# EAGLE board LedController (EAGLE 6.4)
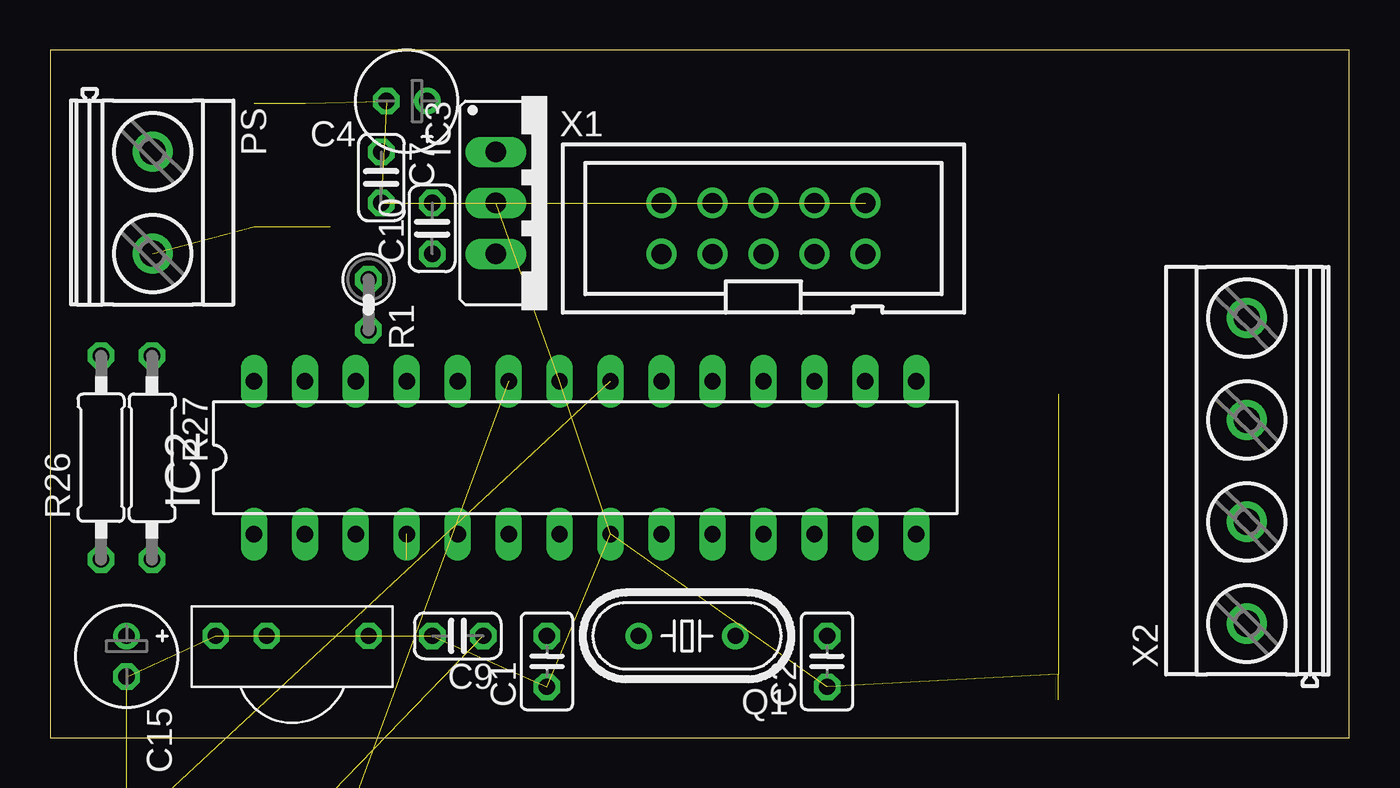
[diagram p0: board, top side]
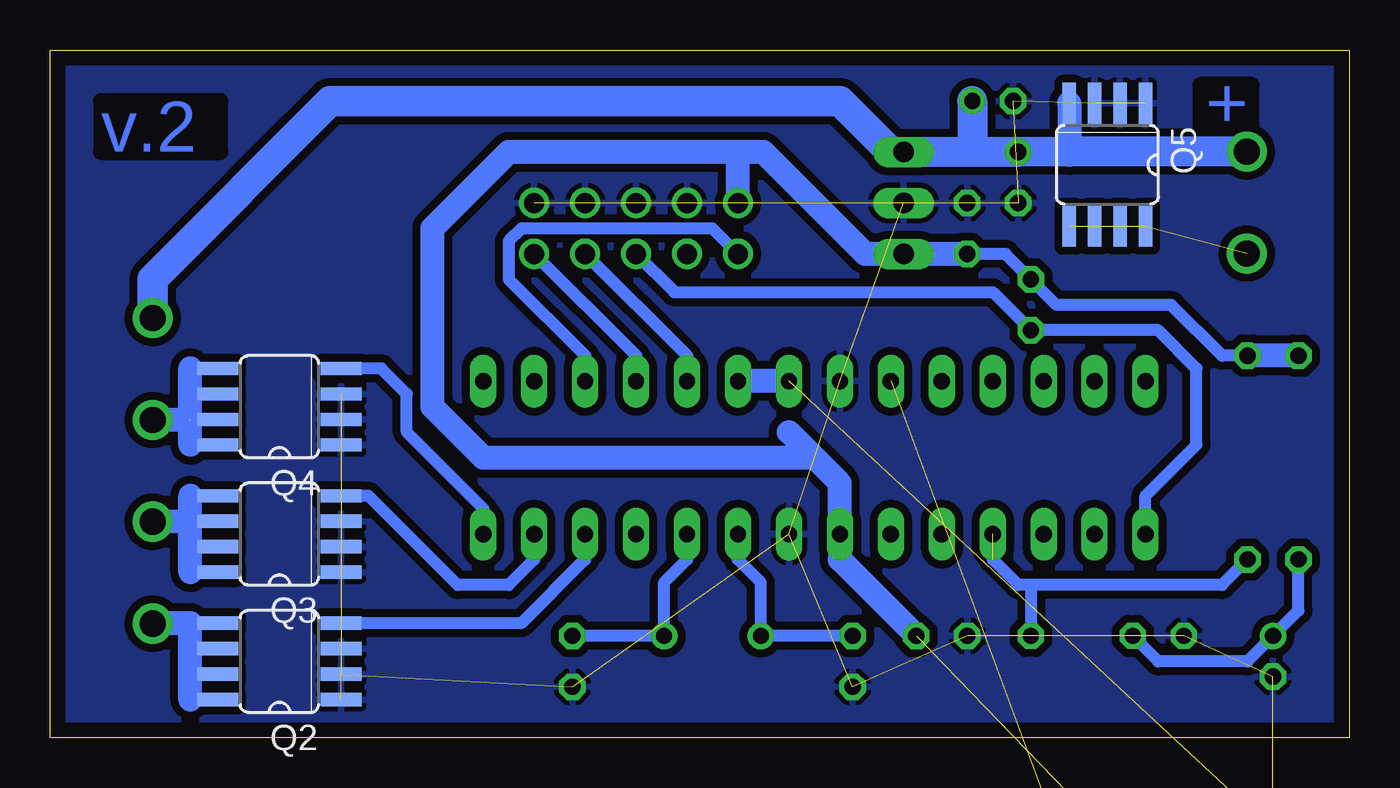
[diagram p1: board, bottom side, seen from below]

Size 64.77 x 34.29 mm. Coordinates in mm from the lower left corner, seen from the top.
Outline: 0,0 64.77,0 64.77,34.29 0,34.29 0,0
Copper layers (1*16): Top 0.035mm / dielectric 1.5mm / Bottom 0.035mm
Design rules "default *": minimum track width 10mil, minimum drill 24mil, track to track 8mil, track to pad 8mil, pad to pad 8mil, via to via 8mil, smd to smd 8mil, copper to edge 30mil, drill to drill 8mil, minimum pad ring 10mil, minimum via ring 8mil, stop-mask expansion 4mil, vias tented up to drill 0mil, thermal gap 10mil
Net classes: 0 default: width 0.4 mm; 1 +12V: width 0.406 mm

## Footprints (pad centres in the part's own frame; a part is rotated, then mirrored left to right if it is on the bottom)
C025-025X050 = drill 0.813 octagon: 1 -1.27,0; 2 1.27,0
E2-5 = drill 0.813 pad 1.27: + -1.016,0 | drill 0.813 pad 1.27 octagon: - 1.016,0
C025-024X044 = drill 0.813 octagon: 1 -1.27,0; 2 1.27,0
SOT23-5 = smd 0.6 x 1.2: 1 -0.95,-1.306; 2 0,-1.306; 3 0.95,-1.306; 4 0.95,1.306; 5 -0.95,1.306
DIL28-3 = drill 0.813 long: 1 -16.51,-3.81; 2 -13.97,-3.81; 3 -11.43,-3.81; 4 -8.89,-3.81; 5 -6.35,-3.81; 6 -3.81,-3.81; 7 -1.27,-3.81; 8 1.27,-3.81; 9 3.81,-3.81; 10 6.35,-3.81; 11 8.89,-3.81; 12 11.43,-3.81; 13 13.97,-3.81; 14 16.51,-3.81; 15 16.51,3.81; 16 13.97,3.81; 17 11.43,3.81; 18 8.89,3.81; 19 6.35,3.81; 20 3.81,3.81; 21 1.27,3.81; 22 -1.27,3.81; 23 -3.81,3.81; 24 -6.35,3.81; 25 -8.89,3.81; 26 -11.43,3.81; 27 -13.97,3.81; 28 -16.51,3.81
78XXS = drill 1.016 long: GND 0,-2.54; IN -2.54,-2.54; OUT 2.54,-2.54
MKDSN1,5/2-5,08 = drill 1.3 pad 2: 1 -2.561,0.025; 2 2.519,0.025
HC49/S = drill 0.813: 1 -2.413,0; 2 2.413,0
SO08 = smd 0.66 x 2.032: 1 -1.905,-3.073; 2 -0.635,-3.073; 3 0.635,-3.073; 4 1.905,-3.073; 5 1.905,3.073; 6 0.635,3.073; 7 -0.635,3.073; 8 -1.905,3.073
0207/2V = drill 0.813 octagon: 1 -1.27,0; 2 1.27,0
0207/10 = drill 0.813 octagon: 1 -5.08,0; 2 5.08,0
TSOP = drill 0.8 octagon: GND -3.81,2.54; VO 3.81,2.54; VS -1.27,2.54
PAK100/2500-10 = drill 1 pad 1.422: 1 -5.08,-1.27; 2 -5.08,1.27; 3 -2.54,-1.27; 4 -2.54,1.27; 5 0,-1.27; 6 0,1.27; 7 2.54,-1.27; 8 2.54,1.27; 9 5.08,-1.27; 10 5.08,1.27
MKDSN1,5/4-5,08 = drill 1.3 pad 2: 1 -7.641,0.025; 2 -2.561,0.025; 3 2.519,0.025; 4 7.599,0.025

## Placement (x,y rotation side)
C1  22pF  [C025-025X050]  24.77,3.81 90 top
C2  22pF  [C025-025X050]  38.73,3.81 90 top
C3  100nF  [C025-025X050]  2.54,-6.99 0 top  (outside the outline)
C4  100uF  [E2-5]  17.78,31.75 180 top
C5  1uF  [C025-024X044]  1.91,-25.4 0 top  (outside the outline)
C6  4n7  [C025-024X044]  -5.08,-60.96 0 top  (outside the outline)
C7  100nF  [C025-024X044]  16.51,27.94 270 top
C9  100nF  [C025-024X044]  20.32,5.08 180 top
C10  100nF  [C025-024X044]  19.05,25.4 90 top
C15  4.7uF  [E2-5]  3.81,4.06 270 top
IC1  MCP601R  [SOT23-5]  -4.45,-31.75 0 top  (outside the outline)
IC2  MEGA8-P  [DIL28-3]  26.67,13.97 0 top
IC3  7805  [78XXS]  24.77,26.67 270 top
PS  MKDSN1,5/2-5,08  [MKDSN1,5/2-5,08]  5.08,26.67 270 top
Q1  16MHz  [HC49/S]  31.75,5.08 180 top
Q2  FDS8884  [SO08]  53.34,3.81 90 bottom
Q3  FDS8884  [SO08]  53.34,10.16 90 bottom
Q4  FDS8884  [SO08]  53.34,16.51 90 bottom
Q5  FDS8884  [SO08]  12.06,28.57 180 bottom
R1  10k  [0207/2V]  15.88,21.59 270 top
R2  100  [0207/2V]  2.54,-13.34 0 top  (outside the outline)
R3  1k  [0207/2V]  2.54,-19.05 0 top  (outside the outline)
R4  1k  [0207/2V]  2.54,-31.75 0 top  (outside the outline)
R5  10k  [0207/2V]  -5.08,-37.47 0 top  (outside the outline)
R6  10k  [0207/2V]  -5.08,-43.18 0 top  (outside the outline)
R7  10k  [0207/2V]  -5.08,-48.9 0 top  (outside the outline)
R8  12k  [0207/2V]  -5.08,-54.61 0 top  (outside the outline)
R26  100R  [0207/10]  2.54,13.97 90 top
R27  10k  [0207/10]  5.08,13.97 270 top
TSOP  TSOP  [TSOP]  12.06,2.54 0 top
X1  2510-  [PAK100/2500-10]  35.56,25.4 0 top
X2  MKDSN1,5/4-5,08  [MKDSN1,5/4-5,08]  59.69,13.34 90 top

## Library data of the parts
C1-C7 C9 C10 C15 R1-R8 R26 R27 = rcl
IC1 = linear
IC2 = atmel
IC3 = v-reg
PS X2 = con-phoenix-508
Q1 = crystal
Q2-Q5 = FDS8884
TSOP = TSOP1736
X1 = con-3m

## Nets
+5V: C9.1 C10.1 IC1.2 IC2.7 IC3.OUT R1.1 R2.2 R3.2 R5.1 R26.2 R27.1 X1.2
+12V: C4.+ C7.1 IC3.IN PS.1 Q5.4 X2.4
ADC: C6.2 IC2.23 R8.2
GND: C1.1 C2.1 C3.2 C4.- C6.1 C7.2 C9.2 C10.2 C15.- IC1.5 IC2.8 IC2.22 IC3.GND Q2.1 Q2.2 Q2.3 Q3.1 Q3.2 Q3.3 Q4.1 Q4.2 Q4.3 Q5.1 Q5.2 Q5.3 R6.2 TSOP.GND X1.4 X1.6 X1.8 X1.10
IR: IC2.4 R27.2 TSOP.VO
ISP_CLK: IC2.19 X1.7
ISP_MISO: IC2.18 X1.9
ISP_MOSI: IC2.17 X1.1
ISP_RESET: IC2.1 R1.2 X1.5
N$1: C5.1 R3.1
N$2: C1.2 IC2.9 Q1.2
N$3: C2.2 IC2.10 Q1.1
N$4: Q2.5 Q2.6 Q2.7 Q2.8 X2.1
N$5: Q3.5 Q3.6 Q3.7 Q3.8 X2.2
N$6: Q4.5 Q4.6 Q4.7 Q4.8 X2.3
N$7: C3.1 IC2.20 IC2.21 R2.1
N$8: PS.2 Q5.5 Q5.6 Q5.7 Q5.8
N$9: C5.2 R4.2 R7.1
N$10: IC1.4 R4.1
N$11: IC1.3 R5.2 R6.1
N$12: IC1.1 R7.2 R8.1
N$63: C15.+ R26.1 TSOP.VS
PWM_B: IC2.14 Q4.4
PWM_G: IC2.13 Q3.4
PWM_R: IC2.12 Q2.4

## Tracks (layer width: path | path; a pad name or v marks a point on that pad's centre or on a via)
+5V  (4 unrouted)
  Bottom 0.6: R27.1 6.35,19.05 8.89,21.59 14.61,21.59 R1.1 17.14,24.13 C10.1
  Bottom 1.2: 26.67,13.97 25.4,12.7 IC2.7 25.4,8.89 C9.1 | 26.67,13.97 27.94,15.24 | 30.48,29.21 29.21,29.21 24.13,24.13 IC3.OUT C10.1 | 30.48,29.21 41.91,29.21 45.72,25.4 45.72,16.51 43.18,13.97 26.67,13.97 | X1.2 30.48,29.21 | R26.2 R27.1
+12V
  Bottom 1.2: Q5.4 13.97,29.22
  Bottom 1.5: PS.1 13.97,29.22 C7.1 18.41,29.21 | 18.41,29.21 IC3.IN | C4.+ 18.8,29.59 18.41,29.21
  Bottom 1.524: X2.4 59.66,22.89 50.8,31.75 25.4,31.75 22.86,29.21 IC3.IN
ADC  (2 unrouted)
GND  (30 unrouted)
  pour Bottom (isolate 0.4): 0,34.29 0,0 64.77,0 64.77,34.29
IR  (1 unrouted)
  Bottom 0.6: 17.78,8.89 16.51,7.62 15.88,7.62 | R27.2 6.35,7.62 15.88,7.62 | 15.88,7.62 TSOP.VO
ISP_CLK
  Bottom 0.6: IC2.19 33.02,19.05 X1.7
ISP_MISO
  Bottom 0.6: IC2.18 35.56,19.05 X1.9
ISP_MOSI
  Bottom 0.6: IC2.17 38.1,19.05 41.91,22.86 41.91,24.77 41.27,25.4 31.75,25.4 X1.1
ISP_RESET
  Bottom 0.6: IC2.1 10.16,12.06 7.62,14.61 7.62,18.41 9.53,20.32 R1.2 17.78,22.23 33.66,22.23 X1.5
N$1  (1 unrouted)
N$2
  Bottom 0.6: IC2.9 30.48,8.89 29.34,7.75 Q1.2 C1.2
N$3
  Bottom 0.6: IC2.10 33.02,8.89 34.16,7.75 Q1.1 C2.2
N$4
  Bottom 0.66: Q2.8 57.78,1.91 | Q2.7 56.42,3.18 57.78,3.18 | 57.78,5.71 Q2.5 | Q2.6 57.78,4.44
  Bottom 1.2: X2.1 57.78,5.71 57.78,4.44 57.78,3.18 57.78,1.91
N$5
  Bottom 0.66: Q3.8 57.78,8.26 | Q3.7 57.78,9.53 57.78,9.42 | Q3.6 57.78,10.79 57.78,10.52 | 57.78,12.06 Q3.5
  Bottom 1.2: 57.78,10.79 X2.2 | 57.78,10.79 57.78,12.06 | 57.78,8.26 57.78,9.42 57.78,10.79
N$6  (1 unrouted)
  Bottom 0.66: Q4.7 57.78,15.88 57.78,15.95 | Q4.6 57.78,17.14 57.78,16.98 | 57.78,18.41 Q4.5 | Q4.8 57.78,14.61
  Bottom 1.2: 57.78,14.61 57.78,15.85 | 57.78,15.85 57.78,16.98 57.78,18.41 | 57.78,15.85 X2.3
N$7  (2 unrouted)
  Bottom 1.2: IC2.21 IC2.20
N$8  (4 unrouted)
N$9  (2 unrouted)
N$10  (1 unrouted)
N$11  (2 unrouted)
N$12  (2 unrouted)
N$63
  Bottom 0.6: R26.1 2.54,6.35 C15.+ 5.08,3.81 9.53,3.81 TSOP.VS
PWM_B
  Bottom 0.6: Q4.4 48.26,18.41 46.99,17.14 46.99,15.24 43.18,11.43 IC2.14
PWM_G
  Bottom 0.6: Q3.4 48.9,12.06 44.45,7.62 41.91,7.62 40.64,8.89 IC2.13
PWM_R
  Bottom 0.6: Q2.4 41.27,5.71 38.1,8.89 IC2.12

## Text on the board
Bottom: + | v.2